# Altium PCB Main.PcbDoc
Units mm, origin at the board's own origin, x right, y up, seen from the top; angles counter-clockwise.
Board outline 130 x 43 mm, 2 copper layers (Top Layer, Bottom Layer); 5 components, 21 nets, 104 pads, 354 vias.
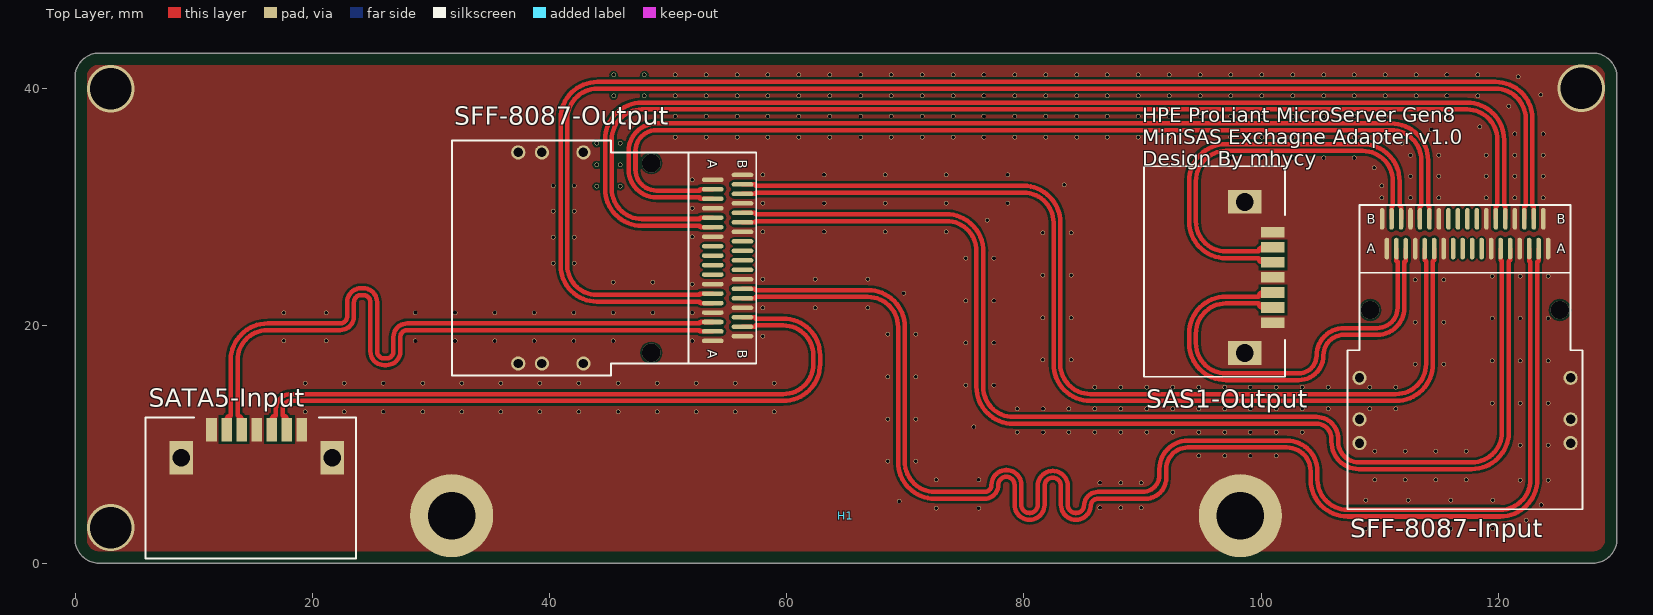
[diagram p0: Top Layer view]
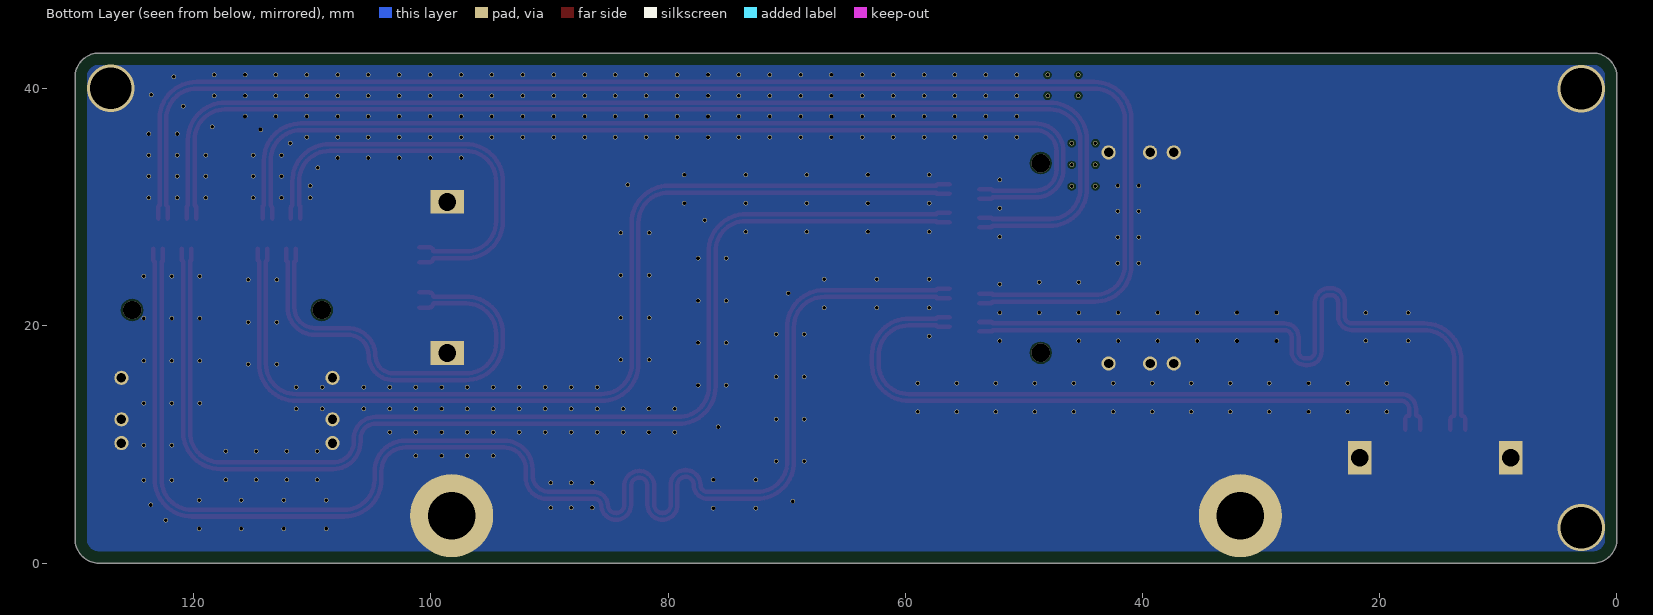
[diagram p1: Bottom Layer view, seen from below]

## Layer stack, top to bottom
Top Solder: solder mask 0.0102, Solder Resist, Dk 3.5
Top Layer: signal copper 0.0356
Dielectric 1: dielectric 0.32, FR-4, Dk 4.8
Bottom Layer: signal copper 0.0356
Bottom Solder: solder mask 0.0102, Solder Resist, Dk 3.5

## Board outline
2,0 cw(c2,2) 0,2 0,41 cw(c2,41) 2,43 128,43 cw(c128,41) 130,41 130,2 cw(c128,2) 128,0

## Design rules (kind name [scope] priority, off if disabled: settings)
Clearance "Differential Pair" [InNetClass('DifferentialPair') vs InNet('GND')] p1: gap=0.203 ignorepadtopadclearanceinfootprint=TRUE
Clearance [All] p2: gap=0.152 ignorepadtopadclearanceinfootprint=FALSE
DiffPairsRouting [All] p1: maxlimit=0.254 minlimit=0.191 mostfreqgap=0.191 toplayer_minwidth=0.38 toplayer_maxwidth=0.381 toplayer_prefwidth=0.38 bottomlayer_minwidth=0.38 bottomlayer_maxwidth=0.381 bottomlayer_prefwidth=0.38 maxuncoupledlength=12.7
HoleSize [All] p1 off: absolutevalues=TRUE maxlimit=2.54 minlimit=0.025 maxpercent=80.000 minpercent=20.000
HoleToHoleClearance [All] p1 off: gap=0.254 allowstackedmicrovias=TRUE
MatchedLengths [All] p1: tolerance=5 checknetsindiffpair=TRUE checkdiffpairvsdiffpair=FALSE checkxsignals=FALSE checkothers=FALSE
MinimumSolderMaskSliver [All] p1 off: minsoldermaskwidth=0.254
ParallelSegment [All] p1: limit=254 gap=0.254
PolygonConnect [All] p1: connectstyle=Direct reliefconductorwidth=0.508 reliefentries=4 polygonreliefangle="90 Angle" airgapwidth=0.508
RoutingVias [All] p1: holewidth=0.711 width=1.27 viastyle="Through Hole" minholewidth=0.711 minwidth=1.27 maxholewidth=0.711 maxwidth=1.27
SilkToSilkClearance [All] p1 off: silktosilkclearance=0.254
SilkToSolderMaskClearance [IsPad] p1 off: minsilkscreentomaskgap=0.254 clearancetoexposedcopper=TRUE
SolderMaskExpansion [All] p1: expansion=0.102
Width [All] p1: maxlimit=0.254 minlimit=0.152 preferedwidth=0.254
24 further rules are at their usual default settings.

## Classes and differential pairs
net class SAS1-A: SAS1-A_N SAS1-A_P
net class SAS1-B: SAS1-B_N SAS1-B_P
net class SAS2-A: SAS2-A_N SAS2-A_P
net class SAS2-B: SAS2-B_N SAS2-B_P
net class SAS3-A: SAS3-A_N SAS3-A_P
net class SAS3-B: SAS3-B_N SAS3-B_P
net class SAS4-A: SAS4-A_N SAS4-A_P
net class SAS4-B: SAS4-B_N SAS4-B_P
net class SATA5-A: SATA5-A_N SATA5-A_P
net class SATA5-B: SATA5-B_N SATA5-B_P
net class DifferentialPair: SAS1-A_N SAS1-A_P SAS1-B_N SAS1-B_P SAS2-A_N SAS2-A_P SAS2-B_N SAS2-B_P SAS3-A_N SAS3-A_P SAS3-B_N SAS3-B_P SAS4-A_N SAS4-A_P SAS4-B_N SAS4-B_P SATA5-A_N SATA5-A_P SATA5-B_N SATA5-B_P
differential pair SAS1-A: +SAS1-A_P -SAS1-A_N
differential pair SAS1-B: +SAS1-B_P -SAS1-B_N
differential pair SAS2-A: +SAS2-A_P -SAS2-A_N
differential pair SAS2-B: +SAS2-B_P -SAS2-B_N
differential pair SAS3-A: +SAS3-A_P -SAS3-A_N
differential pair SAS3-B: +SAS3-B_P -SAS3-B_N
differential pair SAS4-A: +SAS4-A_P -SAS4-A_N
differential pair SAS4-B: +SAS4-B_P -SAS4-B_N
differential pair SATA5-A: +SATA5-A_P -SATA5-A_N
differential pair SATA5-B: +SATA5-B_P -SATA5-B_N

## Components (designator, comment, footprint, x,y, rotation, side; value= is the part's Value field where it differs from the comment)
H1 "HP MicroServer GEN8 Hole" GEN8-HDD-Backplane-Hole 31.75,4 r0 top
SAS1-Output "SATA(Controller)" "MOLEX SATA (47080-4001)" 100.99,27.9 r270 top locked
SATA5-Input "SATA(Backplane)" "MOLEX SATA (47080-4001)" 11.5,11.25 r0 top
SFF-8087-Input "SFF-8087(Backplane)" "Molex SFF-8087 (75783-0140)" 109.2,21.34 r0 top locked
SFF-8087-Output "SFF-8087(Controller)" "Molex SFF-8087 (75783-0140)" 48.58,33.73 r270 top locked

## Footprints (in the part's own frame and the unit in brackets; to place one, negate y for a bottom-side part, rotate by r counter-clockwise, add the part's x,y. Pads: shape width x height; smd on the part's side, far side on the other; paste and mask are expansions set on the pad)
GEN8-HDD-Backplane-Hole [mm]
  round 7 hole 4: GND(0,0) GND(66.5,0)
"MOLEX SATA (47080-4001)" [mm] "47080-4001,0470804001"
  rect 2x2.8 hole 1.5: GND(-2.56,-2.36) GND(10.18,-2.36)
  rect 0.9x2 smd: S1(7.62,0) S2(6.35,0) S3(5.08,0) S4(3.81,0) S5(2.54,0) S6(1.27,0) S7(0,0)
  silkscreen extent -5.56,-10.86 12.18,1.04
"Molex SFF-8087 (75783-0140)" [mm] "75783-0140,0757830140"
  oval 0.38x1.83 smd: A1(1.4,5.18) A2(2.2,5.18) A3(3,5.18) A4(3.8,5.18) A5(4.6,5.18) A6(5.4,5.18) A7(6.2,5.18) A8(7,5.18) A9(7.8,5.18) A10(8.6,5.18) A11(9.4,5.18) A12(10.2,5.18) A13(11,5.18) A14(11.8,5.18) A15(12.6,5.18) A16(13.4,5.18) A17(14.2,5.18) A18(15,5.18) B1(1,7.69) B2(1.8,7.69) B3(2.6,7.69) B4(3.4,7.69) B5(4.2,7.69) B6(5,7.69) B7(5.8,7.69) B8(6.6,7.69) B9(7.4,7.69) B10(8.2,7.69) B11(9,7.69) B12(9.8,7.69) B13(10.6,7.69) B14(11.4,7.69) B15(12.2,7.69) B16(13,7.69) B17(13.8,7.69) B18(14.6,7.69)
  round 1.2 hole 0.8: GND(-0.9,-11.22) GND(-0.9,-9.22) GND(-0.9,-5.72) GND(16.9,-11.22) GND(16.9,-9.22) GND(16.9,-5.72)
  silkscreen extent -1.9,-16.8 17.9,8.85

## Via types
v1: diameter 0.38, hole 0.3, Top Layer to Bottom Layer, tented both sides, 347 vias
v2: diameter 1.55, hole 1.55, Top Layer to Bottom Layer, 4 vias
v3: diameter 4, hole 3.5, Top Layer to Bottom Layer, 3 vias

## Nets (pads, with @x,y where several pads share a name; then routed paths per layer and width w, separated by ;. In a path a pad name is that pad's centre, name@x,y a point inside that pad or via, vN(x,y) a via of type N, cw(c..) or ccw(c..) an arc to the next point about the centre after c; other vN are vias at no path point)
GND: H1.GND SAS1-Output.GND SAS1-Output.S1 SAS1-Output.S4 SAS1-Output.S7 SATA5-Input.GND SATA5-Input.S1 SATA5-Input.S4 SATA5-Input.S7 SFF-8087-Input.A1 SFF-8087-Input.A4 SFF-8087-Input.A7 SFF-8087-Input.A12 SFF-8087-Input.A15 SFF-8087-Input.A18 SFF-8087-Input.B1 SFF-8087-Input.B4 SFF-8087-Input.B7 SFF-8087-Input.B12 SFF-8087-Input.B15 SFF-8087-Input.B18 SFF-8087-Input.GND SFF-8087-Output.A1 SFF-8087-Output.A4 SFF-8087-Output.A7 SFF-8087-Output.A12 SFF-8087-Output.A15 SFF-8087-Output.A18 SFF-8087-Output.B1 SFF-8087-Output.B4 SFF-8087-Output.B7 SFF-8087-Output.B12 SFF-8087-Output.B15 SFF-8087-Output.B18 SFF-8087-Output.GND
  other v1: 108.844,2.917 112.414,2.917 115.984,2.917 119.554,2.917 122.36,3.62 72.604,4.637 76.174,4.637 86.417,4.655 88.157,4.655 89.897,4.655 123.61,4.9 69.502,5.195 108.844,5.299 112.414,5.299 115.984,5.299 119.554,5.299 86.417,6.774 88.157,6.774 89.897,6.774 121.869,6.98 124.21,6.98 72.604,7.019 76.174,7.019 109.604,7.027 112.174,7.027 114.744,7.027 117.314,7.027 68.507,8.576 70.889,8.576 94.734,9.035 96.921,9.035 99.107,9.035 101.294,9.035 109.604,9.449 112.174,9.449 114.744,9.449 117.314,9.449 121.859,9.936 124.2,9.936 79.427,11.035 81.613,11.035 83.8,11.035 85.987,11.035 88.174,11.035 90.36,11.035 92.547,11.035 94.734,11.035 96.921,11.035 99.107,11.035 101.294,11.035 103.481,11.035 75.767,11.477 68.507,12.146 70.889,12.146 19.406,12.765 22.703,12.765 25.999,12.765 29.296,12.765 32.592,12.765 35.889,12.765 39.185,12.765 42.482,12.765 45.778,12.765 49.075,12.765 52.371,12.765 55.668,12.765 58.964,12.765 79.427,13 81.613,13 83.8,13 85.987,13 88.174,13 90.36,13 92.547,13 94.734,13 96.921,13 99.107,13 101.294,13 103.481,13 105.667,13 109.16,13 111.346,13 119.477,13.486 121.859,13.486 124.2,13.486 85.987,14.84 88.174,14.84 90.36,14.84 92.547,14.84 94.734,14.84 96.921,14.84 99.107,14.84 101.294,14.84 103.481,14.84 105.667,14.84 109.16,14.84 111.346,14.84 75.097,14.996 77.479,14.996 19.406,15.165 22.703,15.165 25.999,15.165 29.296,15.165 32.592,15.165 35.889,15.165 39.185,15.165 42.482,15.165 45.778,15.165 49.075,15.165 52.371,15.165 55.668,15.165 58.964,15.165 68.507,15.716 70.889,15.716 113,16.756 115.4,16.756 119.477,17.056 121.859,17.056 124.2,17.056 81.607,17.136 83.989,17.136 75.097,18.566 77.479,18.566 28.697,18.73 32.032,18.73 35.367,18.73 38.701,18.73 42.036,18.73 45.371,18.73 52.04,18.73 17.596,18.741 21.166,18.741 57.99,19.13 68.507,19.286 70.889,19.286 113,20.326 115.4,20.326 119.477,20.626 121.859,20.626 124.2,20.626 81.607,20.706 83.989,20.706 17.596,21.123 21.166,21.123 28.697,21.13 32.032,21.13 35.367,21.13 38.701,21.13 42.036,21.13 45.371,21.13 48.705,21.13 52.04,21.13 57.99,21.53 62.405,21.53 66.82,21.53 75.097,22.136 77.479,22.136 69.849,22.756 52.04,23.53 45.371,23.689 48.705,23.689 113,23.896 115.4,23.896 57.99,23.93 62.405,23.93 66.82,23.93 119.477,24.196 121.859,24.196 124.2,24.196 81.607,24.276 83.989,24.276 40.32,25.287 42.07,25.287 75.097,25.706 77.479,25.706 40.32,27.471 42.07,27.471 52.04,27.53 81.607,27.846 83.989,27.846 57.99,27.93 63.147,27.93 68.303,27.93 73.46,27.93 76.909,28.926 40.32,29.655 42.07,29.655 52.04,29.93 57.99,30.33 63.147,30.33 68.303,30.33 73.46,30.33 78.62,30.33 110.19,30.824 112.6,30.824 114.993,30.824 119,30.824 121.4,30.824 123.8,30.824 110.19,31.83 40.32,31.839 42.07,31.839 83.419,31.916 52.04,32.33 112.6,32.609 114.993,32.609 119,32.609 121.4,32.609 123.8,32.609 57.99,32.73 63.147,32.73 68.303,32.73 73.46,32.73 78.62,32.73 109.54,33.32 97.459,34.16 100.062,34.16 102.665,34.16 105.268,34.16 107.871,34.16 112.6,34.394 114.993,34.394 119,34.394 121.4,34.394 123.8,34.394 111.87,35.39 50.607,35.91 53.21,35.91 55.813,35.91 58.416,35.91 61.019,35.91 63.622,35.91 66.224,35.91 68.827,35.91 71.43,35.91 74.033,35.91 76.636,35.91 79.239,35.91 81.842,35.91 84.445,35.91 87.048,35.91 89.651,35.91 92.254,35.91 94.857,35.91 97.459,35.91 100.062,35.91 102.665,35.91 105.268,35.91 107.871,35.91 110.474,35.91 121.4,36.184 123.8,36.184 114.37,36.56 118.45,36.79 50.607,37.66 53.21,37.66 55.813,37.66 58.416,37.66 61.019,37.66 63.622,37.66 66.224,37.66 68.827,37.66 71.43,37.66 74.033,37.66 76.636,37.66 79.239,37.66 81.842,37.66 84.445,37.66 87.048,37.66 89.651,37.66 92.254,37.66 94.857,37.66 97.459,37.66 100.062,37.66 102.665,37.66 105.268,37.66 107.871,37.66 110.474,37.66 113.077,37.66 115.677,37.66 120.87,38.54 50.607,39.41 53.21,39.41 55.813,39.41 58.416,39.41 61.019,39.41 63.622,39.41 66.224,39.41 68.827,39.41 71.43,39.41 74.033,39.41 76.636,39.41 79.239,39.41 81.842,39.41 84.445,39.41 87.048,39.41 89.651,39.41 92.254,39.41 94.857,39.41 97.459,39.41 100.062,39.41 102.665,39.41 105.268,39.41 107.871,39.41 110.474,39.41 113.077,39.41 115.677,39.41 118.277,39.41 123.57,39.474 121.7,41.024 50.607,41.16 53.21,41.16 55.813,41.16 58.416,41.16 61.019,41.16 63.622,41.16 66.224,41.16 68.827,41.16 71.43,41.16 74.033,41.16 76.636,41.16 79.239,41.16 81.842,41.16 84.445,41.16 87.048,41.16 89.651,41.16 92.254,41.16 94.857,41.16 97.459,41.16 100.062,41.16 102.665,41.16 105.268,41.16 107.871,41.16 110.474,41.16 113.077,41.16 115.677,41.16 118.277,41.16
  other v3: 3,3 3,40 127,40.024
SAS1-A_N: SAS1-Output.S3 SFF-8087-Input.A3 | length 38.3
  Top Layer w0.38: SAS1-Output.S3 100.15,22.82 ccw(c100.15,22.47) 99.8,22.47 97.04,22.47 ccw(c97.04,19.36) 93.929,19.36 93.929,18.54 ccw(c97.04,18.54) 97.04,15.429 103.179,15.429 ccw(c103.179,17.5) 105.25,17.5 cw(c107,17.5) 107,19.25 109.795,19.25 ccw(c109.795,21.54) 112.085,21.54 112.085,25.415 ccw(c112.085,25.53) 112.2,25.53 SFF-8087-Input.A3
SAS1-A_P: SAS1-Output.S2 SFF-8087-Input.A2 | length 35.6
  Top Layer w0.38: SAS1-Output.S2 100.15,21.55 cw(c100.15,21.9) 99.8,21.9 97.04,21.9 ccw(c97.04,19.36) 94.5,19.36 94.5,18.54 ccw(c97.04,18.54) 97.04,16 103.179,16 ccw(c103.179,17.5) 104.679,17.5 cw(c107,17.5) 107,19.821 109.795,19.821 ccw(c109.795,21.54) 111.515,21.54 111.515,25.415 cw(c111.515,25.53) 111.4,25.53 SFF-8087-Input.A2
SAS1-B_N: SAS1-Output.S5 SFF-8087-Input.B3 | length 37
  Top Layer w0.38: SAS1-Output.S5 100.15,25.36 cw(c100.15,25.71) 99.8,25.71 97.04,25.71 cw(c97.04,28.82) 93.929,28.82 93.929,32.21 cw(c97.04,32.21) 97.04,35.321 108.575,35.321 cw(c108.575,32.21) 111.685,32.21 111.685,30.135 cw(c111.685,30.02) 111.8,30.02 SFF-8087-Input.B3
SAS1-B_P: SAS1-Output.S6 SFF-8087-Input.B2 | length 34.3
  Top Layer w0.38: SAS1-Output.S6 100.15,26.63 ccw(c100.15,26.28) 99.8,26.28 97.04,26.28 cw(c97.04,28.82) 94.5,28.82 94.5,32.21 cw(c97.04,32.21) 97.04,34.75 108.575,34.75 cw(c108.575,32.21) 111.115,32.21 111.115,30.135 ccw(c111.115,30.02) 111,30.02 SFF-8087-Input.B2
SAS2-A_N: SFF-8087-Input.A6 SFF-8087-Output.B3 | length 85
  Top Layer w0.38: SFF-8087-Output.B3 57.26,31.13 ccw(c57.26,31.245) 57.375,31.245 79.96,31.245 cw(c79.96,28.705) 82.5,28.705 82.5,16.79 ccw(c85.611,16.79) 85.611,13.679 111.375,13.679 ccw(c111.375,16.79) 114.485,16.79 114.485,25.415 cw(c114.6,25.415) 114.6,25.53 SFF-8087-Input.A6
SAS2-A_P: SFF-8087-Input.A5 SFF-8087-Output.B2 | length 84.1
  Top Layer w0.38: SFF-8087-Output.B2 57.26,31.93 cw(c57.26,31.815) 57.375,31.815 79.96,31.815 cw(c79.96,28.705) 83.071,28.705 83.071,16.79 ccw(c85.611,16.79) 85.611,14.25 111.375,14.25 ccw(c111.375,16.79) 113.915,16.79 113.915,25.415 ccw(c113.8,25.415) 113.8,25.53 SFF-8087-Input.A5
SAS2-B_N: SFF-8087-Input.B6 SFF-8087-Output.A3 | length 85.6
  Top Layer w0.38: SFF-8087-Output.A3 52.77,30.73 cw(c52.77,30.845) 52.655,30.845 49,30.845 cw(c49,33.165) 46.679,33.165 46.679,34.75 cw(c49,34.75) 49,37.071 110.975,37.071 cw(c110.975,33.96) 114.085,33.96 114.085,30.135 cw(c114.085,30.02) 114.2,30.02 SFF-8087-Input.B6
SAS2-B_P: SFF-8087-Input.B5 SFF-8087-Output.A2 | length 82.9
  Top Layer w0.38: SFF-8087-Output.A2 52.77,31.53 ccw(c52.77,31.415) 52.655,31.415 49,31.415 cw(c49,33.165) 47.25,33.165 47.25,34.75 cw(c49,34.75) 49,36.5 110.975,36.5 cw(c110.975,33.96) 113.515,33.96 113.515,30.135 ccw(c113.515,30.02) 113.4,30.02 SFF-8087-Input.B5
SAS3-A_N: SFF-8087-Input.A14 SFF-8087-Output.B6 | length 99
  Top Layer w0.38: SFF-8087-Output.B6 57.26,28.73 ccw(c57.26,28.845) 57.375,28.845 73.46,28.845 cw(c73.46,26.305) 76,26.305 76,14.861 ccw(c79.111,14.861) 79.111,11.75 104.679,11.75 cw(c104.679,10.5) 105.929,10.5 105.929,10.25 ccw(c108.25,10.25) 108.25,7.929 117.775,7.929 ccw(c117.775,11.04) 120.885,11.04 120.885,25.415 cw(c121,25.415) 121,25.53 SFF-8087-Input.A14
SAS3-A_P: SFF-8087-Input.A13 SFF-8087-Output.B5 | length 98.1
  Top Layer w0.38: SFF-8087-Output.B5 57.26,29.53 cw(c57.26,29.415) 57.375,29.415 73.46,29.415 cw(c73.46,26.305) 76.571,26.305 76.571,14.861 ccw(c79.111,14.861) 79.111,12.321 104.679,12.321 cw(c104.679,10.5) 106.5,10.5 106.5,10.25 ccw(c108.25,10.25) 108.25,8.5 117.775,8.5 ccw(c117.775,11.04) 120.315,11.04 120.315,25.415 ccw(c120.2,25.415) 120.2,25.53 SFF-8087-Input.A13
SAS3-B_N: SFF-8087-Input.B14 SFF-8087-Output.A6 | length 101.2
  Top Layer w0.38: SFF-8087-Output.A6 52.77,28.33 cw(c52.77,28.445) 52.655,28.445 47.79,28.445 cw(c47.79,31.555) 44.679,31.555 44.679,35.71 cw(c47.79,35.71) 47.79,38.821 117.375,38.821 cw(c117.375,35.71) 120.485,35.71 120.485,30.135 cw(c120.485,30.02) 120.6,30.02 SFF-8087-Input.B14
SAS3-B_P: SFF-8087-Input.B13 SFF-8087-Output.A5 | length 98.7
  Top Layer w0.38: SFF-8087-Output.A5 52.77,29.13 ccw(c52.77,29.015) 52.655,29.015 47.79,29.015 cw(c47.79,31.555) 45.25,31.555 45.25,35.71 cw(c47.79,35.71) 47.79,38.25 117.375,38.25 cw(c117.375,35.71) 119.915,35.71 ; SFF-8087-Input.B13 119.8,30.02 cw(c119.915,30.02) 119.915,30.135 119.915,35.71 ; 119.915,35.946 119.915,35.71
SAS4-A_N: SFF-8087-Input.A17 SFF-8087-Output.B14 | length 119.7
  Top Layer w0.38: SFF-8087-Output.B14 57.26,22.33 ccw(c57.26,22.445) 57.375,22.445 66.849,22.445 cw(c66.849,19.905) 69.389,19.905 69.389,8.54 ccw(c72.5,8.54) 72.5,5.429 76.675,5.429 ccw(c76.675,6.588) 77.833,6.588 cw(c78.525,6.588) 78.525,7.279 cw(c78.525,6.588) 79.216,6.588 79.216,4.916 ccw(c80.478,4.916) 80.478,3.654 ccw(c80.478,4.916) 81.741,4.916 81.741,6.513 cw(c82.432,6.513) 82.432,7.205 cw(c82.432,6.513) 83.124,6.513 83.124,4.916 ccw(c84.386,4.916) 84.386,3.654 ccw(c84.386,4.916) 85.641,4.775 ccw(c85.363,4.842) 85.649,4.842 cw(c86.236,4.842) 86.236,5.429 90.236,5.429 ccw(c90.236,7.193) 92,7.193 92,7.929 cw(c93.821,7.929) 93.821,9.75 102.179,9.75 cw(c102.179,7.75) 104.179,7.75 104.179,7.04 ccw(c107.29,7.04) 107.29,3.929 120.175,3.929 ccw(c120.175,7.04) 123.285,7.04 123.285,25.415 ccw(c123.285,25.53) 123.4,25.53 SFF-8087-Input.A17
SAS4-A_P: SFF-8087-Input.A16 SFF-8087-Output.B13 | length 118.7
  Top Layer w0.38: SFF-8087-Output.B13 57.26,23.13 cw(c57.26,23.015) 57.375,23.015 66.849,23.015 cw(c66.849,19.905) 69.96,19.905 69.96,8.54 ccw(c72.5,8.54) 72.5,6 76.675,6 ccw(c76.675,6.588) 77.262,6.588 cw(c78.525,6.588) 78.525,7.85 cw(c78.525,6.588) 79.787,6.588 79.787,4.916 ccw(c80.478,4.916) 80.478,4.224 ccw(c80.478,4.916) 81.17,4.916 81.17,6.513 cw(c82.432,6.513) 82.432,7.776 cw(c82.432,6.513) 83.695,6.513 83.695,4.916 ccw(c84.386,4.916) 84.386,4.224 ccw(c84.386,4.916) 85.078,4.916 cw(c85.363,4.916) 85.087,4.988 cw(c86.236,4.842) 86.236,6 90,6 ccw(c90,7.429) 91.429,7.429 91.429,7.929 cw(c93.821,7.929) 93.821,10.321 102.179,10.321 cw(c102.179,7.75) 104.75,7.75 104.75,7.04 ccw(c107.29,7.04) 107.29,4.5 120.175,4.5 ccw(c120.175,7.04) 122.715,7.04 122.715,25.415 cw(c122.715,25.53) 122.6,25.53 SFF-8087-Input.A16
SAS4-B_N: SFF-8087-Input.B17 SFF-8087-Output.A14 | length 121
  Top Layer w0.38: SFF-8087-Output.A14 52.77,21.93 cw(c52.77,22.045) 52.655,22.045 44,22.045 cw(c44,25.115) 40.929,25.115 40.929,37.46 cw(c44.04,37.46) 44.04,40.571 119.775,40.571 cw(c119.775,37.46) 122.885,37.46 122.885,30.135 cw(c122.885,30.02) 123,30.02 SFF-8087-Input.B17
SAS4-B_P: SFF-8087-Input.B16 SFF-8087-Output.A13 | length 118.3
  Top Layer w0.38: SFF-8087-Output.A13 52.77,22.73 ccw(c52.77,22.615) 52.655,22.615 44,22.615 cw(c44,25.115) 41.5,25.115 41.5,37.46 cw(c44.04,37.46) 44.04,40 119.775,40 cw(c119.775,37.46) 122.315,37.46 122.315,30.135 ccw(c122.315,30.02) 122.2,30.02 SFF-8087-Input.B16
SATA5-A_N: SATA5-Input.S3 SFF-8087-Output.B17 | length 57.6
  Top Layer w0.38: SATA5-Input.S3 16.58,12.09 cw(c16.93,12.09) 16.93,12.44 16.93,13 cw(c18.18,13) 18.18,14.25 59.71,14.25 ccw(c59.71,16.79) 62.25,16.79 62.25,17.505 ccw(c59.71,17.505) 59.71,20.045 57.375,20.045 cw(c57.26,20.045) 57.26,19.93 SFF-8087-Output.B17
SATA5-A_P: SATA5-Input.S2 SFF-8087-Output.B16 | length 58.5
  Top Layer w0.38: SATA5-Input.S2 17.85,12.09 ccw(c17.5,12.09) 17.5,12.44 17.5,13 cw(c18.18,13) 18.18,13.679 59.71,13.679 ccw(c59.71,16.79) 62.821,16.79 62.821,17.505 ccw(c59.71,17.505) 59.71,20.615 57.375,20.615 ccw(c57.26,20.615) 57.26,20.73 SFF-8087-Output.B16
SATA5-B_N: SATA5-Input.S5 SFF-8087-Output.A17 | length 57.2
  Top Layer w0.38: SATA5-Input.S5 14.04,12.09 ccw(c13.69,12.09) 13.69,12.44 13.69,17.105 cw(c16.23,17.105) 16.23,19.645 22.348,19.645 ccw(c22.348,20.808) 23.511,20.808 23.511,22.006 cw(c24.103,22.006) 24.103,22.599 24.298,22.599 cw(c24.298,22.006) 24.891,22.006 24.891,17.854 ccw(c26.054,17.854) 26.054,16.691 26.249,16.691 ccw(c26.249,17.854) 27.412,17.854 27.412,19.052 cw(c28.005,19.052) 28.005,19.645 52.655,19.645 ccw(c52.77,19.645) 52.77,19.53 SFF-8087-Output.A17
SATA5-B_P: SATA5-Input.S6 SFF-8087-Output.A16 | length 58.1
  Top Layer w0.38: SATA5-Input.S6 12.77,12.09 cw(c13.12,12.09) 13.12,12.44 13.12,17.105 cw(c16.23,17.105) 16.23,20.215 22.348,20.215 ccw(c22.348,20.808) 22.94,20.808 22.94,22.006 cw(c24.103,22.006) 24.103,23.169 24.298,23.169 cw(c24.298,22.006) 25.461,22.006 25.461,17.854 ccw(c26.054,17.854) 26.054,17.261 26.249,17.261 ccw(c26.249,17.854) 26.841,17.854 26.841,19.052 cw(c28.005,19.052) 28.005,20.215 52.655,20.215 cw(c52.77,20.215) 52.77,20.33 SFF-8087-Output.A16
pads on no net: SFF-8087-Input.A8 SFF-8087-Input.A9 SFF-8087-Input.A10 SFF-8087-Input.A11 SFF-8087-Input.B8 SFF-8087-Input.B9 SFF-8087-Input.B10 SFF-8087-Input.B11 SFF-8087-Output.A8 SFF-8087-Output.A9 SFF-8087-Output.A10 SFF-8087-Output.A11 SFF-8087-Output.B8 SFF-8087-Output.B9 SFF-8087-Output.B10 SFF-8087-Output.B11
copper on no net:
  other v1: 43.965,31.76 45.965,31.76 43.965,33.583 45.965,33.583 43.965,35.405 45.965,35.405 45.401,39.41 48.004,39.41 45.401,41.16 48.004,41.16
  other v2: 48.58,17.73 109.2,21.34 125.2,21.34 48.58,33.73

## Polygon pours and split planes (outlines as drawn)
GND on Top Layer "Top Layer-No Net" (solid, pour order 1): 1,2 1,41 cw(c2,41) 2,42 128,42 cw(c128,41) 129,41 129,2 cw(c128,2) 128,1 2,1 cw(c2,2)
GND on Bottom Layer "Top Layer-No Net1" (solid, pour order 2): 1,2 1,41 cw(c2,41) 2,42 128,42 cw(c128,41) 129,41 129,2 cw(c128,2) 128,1 2,1 cw(c2,2)

## Silkscreen, mask and mechanical layers (free items; w line width, h text height)
Top Overlay:
  text "HPE ProLiant MicroServer Gen8 / MiniSAS Exchagne Adapter v1.0 / Design By mhycy" at 90,33.5 h1.22
Mechanical 1:
  lines w0.152: 2,43 ccw(c2,41) 0,41 0,2 ccw(c2,2) 2,0 128,0 ccw(c128,2) 130,2 130,41 ccw(c128,41) 128,43 2,43 ; 2,43 2,43 ; 128,1 ccw(c128,2) 129,2 129,41 ccw(c128,41) 128,42 2,42 ccw(c2,41) 1,41 1,2 ccw(c2,2) 2,1 128,1 ; 128,1 128,1

## Text inside footprints (layer, text, board x,y; h text height)
SFF-8087-Input: Top Overlay "B" at 108.93,28.63 h0.81; Top Overlay "B" at 124.93,28.63 h0.81; Top Overlay "A" at 108.93,26.12 h0.81; Top Overlay "A" at 124.93,26.12 h0.81
SFF-8087-Output: Top Overlay "B" at 55.87,34 h0.81 r270; Top Overlay "B" at 55.87,18 h0.81 r270; Top Overlay "A" at 53.36,34 h0.81 r270; Top Overlay "A" at 53.36,18 h0.81 r270